# EAGLE board Sensor Board@49fd1e21e8034814a26c2d07324bd6b1 (EAGLE 6.4)
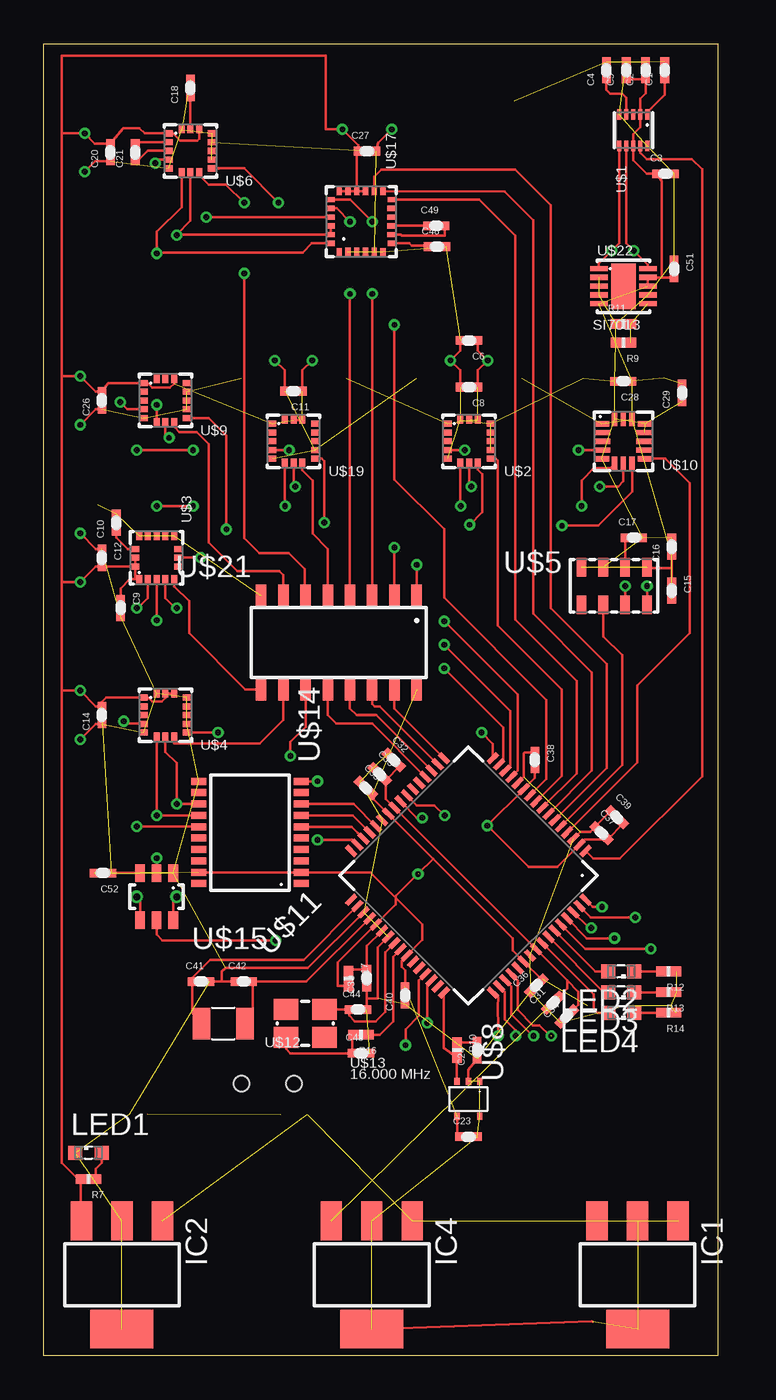
[diagram p0: board, top side]
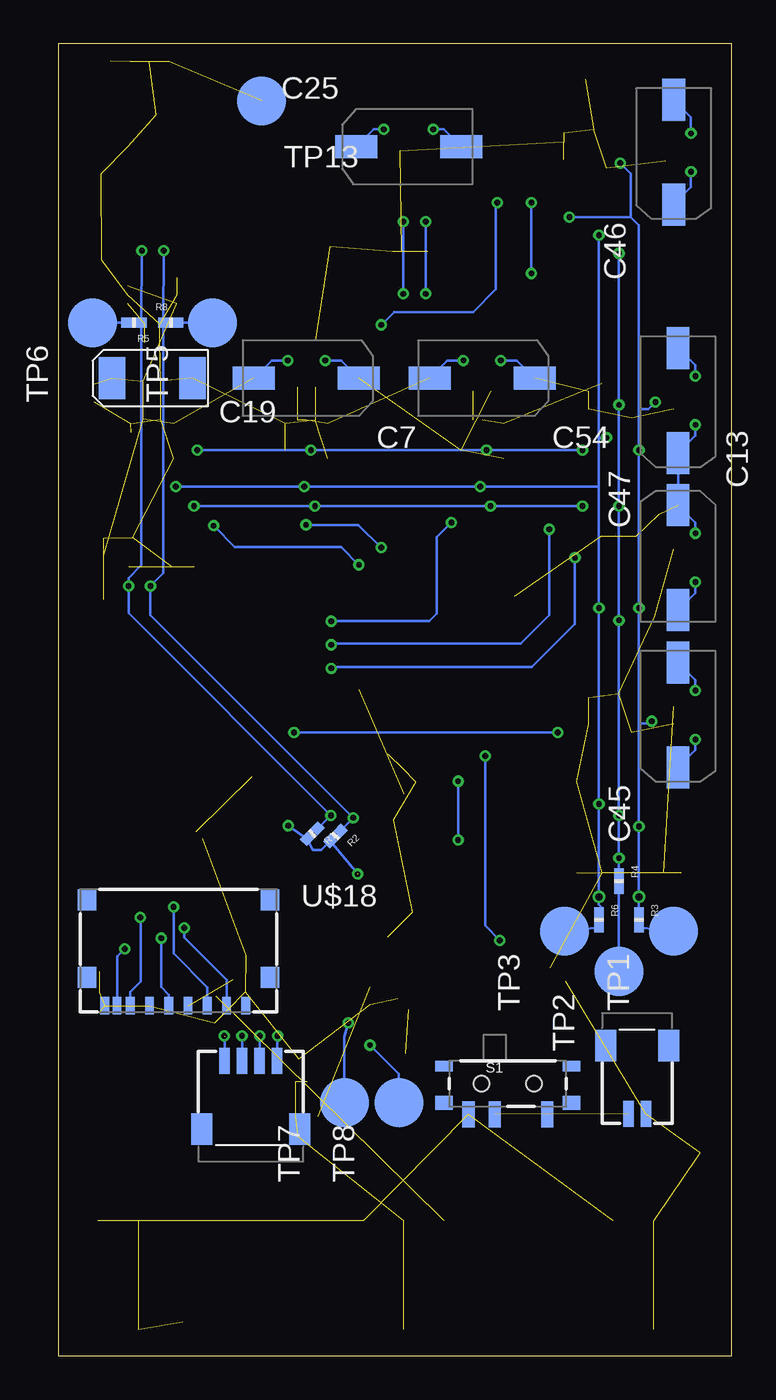
[diagram p1: board, bottom side, seen from below]

Size 38.5 x 75 mm. Coordinates in mm from the lower left corner, seen from the top.
Outline: 38.5,0 0,0 0,75 38.5,75 38.5,0
Copper layers (1*2*15*16): Top 0.035mm / dielectric 0.2mm / Route2 0.0175mm / dielectric 1.1mm / Route15 0.0175mm / dielectric 0.2mm / Bottom 0.035mm
Design rules "SeeedStudio_DRU_no_angle_20130527": minimum track width 6mil, minimum drill 12mil, track to track 6mil, track to pad 6mil, pad to pad 6mil, via to via 6mil, smd to smd 0mil, copper to edge 10mil, drill to drill 10mil, minimum pad ring 6mil, minimum via ring 6mil, stop-mask expansion 2mil, vias tented up to drill 25mil, thermal gap 10mil

## Footprints (pad centres in the part's own frame; a part is rotated, then mirrored left to right if it is on the bottom)
C0402 = smd 0.5 x 0.5: 1 -0.5,0; 2 0.5,0
4.3X7.3SMD = smd 2.4 x 1.3: P$1 -3,0; P$2 3,0
EIA6032 = smd 1.5 x 2.4: P$1 -2.3,0; P$2 2.3,0
SOT223 = smd 1.219 x 2.235: 1 -2.311,-3.099; 2 0,-3.099; 3 2.311,-3.099 | smd 3.6 x 2.2: 4 0,3.099
501568-0207 = smd 0.6 x 1.5: P$1 -0.5,3.9; P$2 0.5,3.9 | smd 1.2 x 1.8: P$5 -1.8,0; P$6 1.8,0
LED_SML0603 = smd 0.8 x 0.8: A 0.75,0; C -0.75,0
R0402 = smd 0.6 x 0.55: 1 -0.425,0; 2 0.425,0
SWITCH-SPST-SMD-A = smd 0.7 x 1.5: 1 -2.25,-1.75; 2 -0.75,-1.75; 3 2.25,-1.75 | smd 1 x 0.6: GND1 -3.65,1; GND3 3.65,1 | smd 1 x 0.8: GND2 -3.65,-1.1; GND4 3.65,-1.1 | hole 0.9: -1.5,0; 1.5,0
TESTPAD(ROUND) = smd 2.794 x 2.794: P$1 0,0
DFN-10(2X2) = smd 0.6 x 0.225: P$1 -0.9,0.8; P$2 -0.9,0.4; P$3 -0.9,0; P$4 -0.9,-0.4; P$5 -0.9,-0.8; P$6 0.9,-0.8; P$7 0.9,-0.4; P$8 0.9,0; P$9 0.9,0.4; P$10 0.9,0.8
LGA-16(3X3) = smd 0.45 x 0.345: P$1 -1.225,1; P$2 -1.225,0.5; P$3 -1.225,0; P$4 -1.225,-0.5; P$5 -1.225,-1; P$9 1.225,-1; P$10 1.225,-0.5; P$11 1.225,0; P$12 1.225,0.5; P$13 1.225,1 | smd 0.345 x 0.45: P$6 -0.5,-1.225; P$7 0,-1.225; P$8 0.5,-1.225; P$14 0.5,1.225; P$15 0,1.225; P$16 -0.5,1.225
LGA-8(5X3) = smd 0.55 x 1.05: P$1 -1.875,-1.075; P$2 -0.625,-1.075; P$3 0.625,-1.075; P$4 1.875,-1.075; P$5 1.875,1.075; P$6 0.625,1.075; P$7 -0.625,1.075; P$8 -1.875,1.075
501568-0407 = smd 0.6 x 1.5: P$1 -1.5,3.9; P$2 -0.5,3.9; P$3 0.5,3.9; P$4 1.5,3.9 | smd 1.2 x 1.8: P$5 -2.8,0; P$6 2.8,0
SOT323-5L = smd 0.4 x 0.3: P$1 1,-0.65; P$2 1,0; P$3 1,0.65; P$4 -1,0.65; P$5 -1,-0.65
LGA-16(3X3.25) = smd 0.865 x 0.3: P$1 -1.242,1; P$5 -1.242,-1; P$9 1.242,-1; P$13 1.242,1 | smd 0.925 x 0.3: P$2 -1.212,0.5; P$3 -1.212,0; P$4 -1.212,-0.5; P$10 1.212,-0.5; P$11 1.212,0; P$12 1.212,0.5 | smd 0.3 x 0.8: P$6 -0.5,-1.275; P$7 0,-1.275; P$8 0.5,-1.275; P$14 0.5,1.275; P$15 0,1.275; P$16 -0.5,1.275
S-PQFP-G64 = smd 0.75 x 0.27: P$1 -5.725,3.75; P$2 -5.725,3.25; P$3 -5.725,2.75; P$4 -5.725,2.25; P$5 -5.725,1.75; P$6 -5.725,1.25; P$7 -5.725,0.75; P$8 -5.725,0.25; P$9 -5.725,-0.25; P$10 -5.725,-0.75; P$11 -5.725,-1.25; P$12 -5.725,-1.75; P$13 -5.725,-2.25; P$14 -5.725,-2.75; P$15 -5.725,-3.25; P$16 -5.725,-3.75; P$33 5.725,-3.75; P$34 5.725,-3.25; P$35 5.725,-2.75; P$36 5.725,-2.25; P$37 5.725,-1.75; P$38 5.725,-1.25; P$39 5.725,-0.75; P$40 5.725,-0.25; P$41 5.725,0.25; P$42 5.725,0.75; P$43 5.725,1.25; P$44 5.725,1.75; P$45 5.725,2.25; P$46 5.725,2.75; P$47 5.725,3.25; P$48 5.725,3.75 | smd 0.27 x 0.75: P$17 -3.75,-5.725; P$18 -3.25,-5.725; P$19 -2.75,-5.725; P$20 -2.25,-5.725; P$21 -1.75,-5.725; P$22 -1.25,-5.725; P$23 -0.75,-5.725; P$24 -0.25,-5.725; P$25 0.25,-5.725; P$26 0.75,-5.725; P$27 1.25,-5.725; P$28 1.75,-5.725; P$29 2.25,-5.725; P$30 2.75,-5.725; P$31 3.25,-5.725; P$32 3.75,-5.725; P$49 3.75,5.725; P$50 3.25,5.725; P$51 2.75,5.725; P$52 2.25,5.725; P$53 1.75,5.725; P$54 1.25,5.725; P$55 0.75,5.725; P$56 0.25,5.725; P$57 -0.25,5.725; P$58 -0.75,5.725; P$59 -1.25,5.725; P$60 -1.75,5.725; P$61 -2.25,5.725; P$62 -2.75,5.725; P$63 -3.25,5.725; P$64 -3.75,5.725
2-SMD(3.2X1.5) = smd 1 x 1.8: P$1 -1.25,0; P$2 1.25,0
4-SMD(3.2X2.5) = smd 1.4 x 1.2: P$1 -1.1,-0.8; P$2 1.1,-0.8; P$3 1.1,0.8; P$4 -1.1,0.8
TSSOP-(PW)-20 = smd 0.4 x 0.85: P$1 -2.925,-2.925; P$2 -2.275,-2.925; P$3 -1.625,-2.925; P$4 -0.975,-2.925; P$5 -0.325,-2.925; P$6 0.325,-2.925; P$7 0.975,-2.925; P$8 1.625,-2.925; P$9 2.275,-2.925; P$10 2.925,-2.925; P$11 2.925,2.925; P$12 2.275,2.925; P$13 1.625,2.925; P$14 0.975,2.925; P$15 0.325,2.925; P$16 -0.325,2.925; P$17 -0.975,2.925; P$18 -1.625,2.925; P$19 -2.275,2.925; P$20 -2.925,2.925
SOT23-6 = smd 0.55 x 1: P$1 0.95,1.35; P$2 0,1.35; P$3 -0.95,1.35; P$4 -0.95,-1.35; P$5 0,-1.35; P$6 0.95,-1.35
LGA-24(4X4) = smd 0.432 x 0.3: P$1 -1.725,1.25; P$6 -1.725,-1.25; P$13 1.725,-1.25; P$18 1.725,1.25 | smd 0.45 x 0.3: P$2 -1.725,0.75; P$3 -1.725,0.25; P$4 -1.725,-0.25; P$5 -1.725,-0.75; P$14 1.725,-0.75; P$15 1.725,-0.25; P$16 1.725,0.25; P$17 1.725,0.75 | smd 0.3 x 0.432: P$7 -1.25,-1.725; P$12 1.25,-1.725; P$19 1.25,1.725; P$24 -1.25,1.725 | smd 0.3 x 0.45: P$8 -0.75,-1.725; P$9 -0.25,-1.725; P$10 0.25,-1.725; P$11 0.75,-1.725; P$20 0.75,1.725; P$21 0.25,1.725; P$22 -0.25,1.725; P$23 -0.75,1.725
SD-105027-1001 = smd 0.5 x 1: P$1 3.85,-6.66; P$2 2.75,-6.66; P$3 1.65,-6.66; P$4 0.55,-6.66; P$5 -0.55,-6.66; P$6 -1.65,-6.66; P$7 -2.75,-6.66; P$8 -3.51,-6.66; P$9 -4.21,-6.66 | smd 1.05 x 1.2: P$10 -5.225,-0.6; P$11 -5.225,-5.05; P$12 5.225,-5.05; P$13 5.225,-0.6
SOIC-16 = smd 0.6 x 1.27: P$1 -4.445,-2.675; P$2 -3.175,-2.675; P$3 -1.905,-2.675; P$4 -0.635,-2.675; P$5 0.635,-2.675; P$6 1.905,-2.675; P$7 3.175,-2.675; P$8 4.445,-2.675; P$9 4.445,2.675; P$10 3.175,2.675; P$11 1.905,2.675; P$12 0.635,2.675; P$13 -0.635,2.675; P$14 -1.905,2.675; P$15 -3.175,2.675; P$16 -4.445,2.675
DFN-10(3X3) = smd 1 x 0.3: P$1 -1.4,1; P$2 -1.4,0.5; P$3 -1.4,0; P$4 -1.4,-0.5; P$5 -1.4,-1; P$6 1.4,-1; P$7 1.4,-0.5; P$8 1.4,0; P$9 1.4,0.5; P$10 1.4,1 | smd 1.4 x 2.6: P$11 0,0

## Placement (x,y rotation side)
C1  100nF  [C0402]  35.48,73.49 90 top
C2  1uF  [C0402]  34.39,73.48 90 top
C3  100nF  [C0402]  35.53,67.56 0 top
C4  100nF  [C0402]  32.16,73.48 90 top
C5  100nF  [C0402]  33.28,73.48 90 top
C6  0.1uF  [C0402]  24.31,58.04 180 top
C7  10uF  [4.3X7.3SMD]  24.31,55.88 0 bottom
C8  100nF  [C0402]  24.31,55.37 180 top
C9  100nF  [C0402]  4.39,42.75 270 top
C10  10nF  [C0402]  4.14,47.62 90 top
C11  1uF  [C0402]  14.27,55.14 180 top
C12  10uF  [C0402]  3.33,45.62 270 top
C13  100nF  [4.3X7.3SMD]  3.07,45.62 90 bottom
C14  100nF  [C0402]  3.33,36.63 90 top
C15  100nF  [C0402]  35.89,43.74 270 top
C16  10uF  [C0402]  35.89,46.25 90 top
C17  100nF  [C0402]  33.72,46.76 0 top
C18  4.7uF  [C0402]  8.38,72.47 90 top
C19  1uF  [EIA6032]  33.12,55.88 0 bottom
C20  100nF  [C0402]  3.81,68.8 90 top
C21  0.22uF  [C0402]  5.23,68.8 90 top
C23  0.1uF  [C0402]  24.27,12.52 0 top
C24  1uF  [C0402]  24.76,17.48 90 top
C25  10uF  [4.3X7.3SMD]  18.46,69.11 180 bottom
C26  100nF  [C0402]  3.33,54.61 90 top
C27  100nF  [C0402]  18.46,68.86 0 top
C28  0.1uF  [C0402]  33.12,55.7 180 top
C29  0.1uF  [C0402]  36.47,55.04 90 top
C30  0.1uF  [C0402]  18.46,21.59 90 top
C31  0.1uF  [C0402]  29.1,20.18 45 top
C32  0.1uF  [C0402]  20,34.05 315 top
C33  2.2uF  [C0402]  19.2,33.25 315 top
C34  1.0uF  [C0402]  29.89,19.39 45 top
C35  0.01uF  [C0402]  18.41,32.46 315 top
C36  0.1uF  [C0402]  28.15,21.16 45 top
C37  0.01uF  [C0402]  31.87,29.87 315 top
C38  0.1uF  [C0402]  28.07,34.06 270 top
C39  0.01uF  [C0402]  32.75,30.78 315 top
C40  1.0uF  [C0402]  20.65,20.6 90 top
C41  24pF  [C0402]  8.99,21.39 0 top
C42  24pF  [C0402]  11.43,21.39 0 top
C43  10pF  [C0402]  18.13,17.3 0 top
C44  10pF  [C0402]  17.96,19.79 0 top
C45  10uF  [4.3X7.3SMD]  3.07,36.63 270 bottom
C46  10uF  [4.3X7.3SMD]  3.33,68.8 270 bottom
C47  10uF  [4.3X7.3SMD]  3.07,54.61 270 bottom
C48  4.7uF  [C0402]  22.48,63.4 0 top
C49  0.22uF  [C0402]  22.43,64.59 0 top
C51  [C0402]  36.02,62.13 270 top
C52  0.1uF  [C0402]  3.38,27.59 180 top
C54  10uF  [4.3X7.3SMD]  14.27,55.88 0 bottom
IC1  LT1963EST-1.5  [SOT223]  33.93,4.62 180 top
IC2  LT1963EST-1.5  [SOT223]  4.47,4.62 180 top
IC4  LT1963EST-1.5  [SOT223]  18.74,4.62 180 top
J1  501568-0207  [501568-0207]  5.41,17.73 180 bottom
LED1  Green  [LED_SML0603]  2.55,11.61 0 top
LED2  Green  [LED_SML0603]  32.99,21.97 180 top
LED3  Green  [LED_SML0603]  32.99,20.78 180 top
LED4  Green  [LED_SML0603]  32.99,19.61 180 top
R1  10k  [R0402]  23.98,29.84 225 bottom
R2  10k  [R0402]  22.66,29.72 225 bottom
R3  0  [R0402]  5.31,24.92 270 bottom
R4  0  [R0402]  6.45,27.13 270 bottom
R5  0  [R0402]  34.16,59.05 180 bottom
R6  0  [R0402]  7.59,24.92 270 bottom
R7  10k  [R0402]  2.55,10.11 180 top
R8  0  [R0402]  32.06,59.05 0 bottom
R9  2.0k  [R0402]  33.12,57.91 180 top
R10  200  [R0402]  23.61,17.48 270 top
R11  1.0k  [R0402]  33.12,58.98 0 top
R12  10k  [R0402]  35.71,21.97 180 top
R13  10k  [R0402]  35.71,20.78 180 top
R14  10k  [R0402]  35.71,19.61 180 top
R16  0  [R0402]  18.13,18.35 180 top
R17  10k  [R0402]  17.42,21.56 270 top
S1  Power  [SWITCH-SPST-SMD-A]  12.8,15.54 0 bottom
TP1  TESTPAD(ROUND)  [TESTPAD(ROUND)]  3.33,24.27 270 bottom
TP2  TESTPAD(ROUND)  [TESTPAD(ROUND)]  6.45,21.97 270 bottom
TP3  TESTPAD(ROUND)  [TESTPAD(ROUND)]  9.57,24.27 270 bottom
TP5  TESTPAD(ROUND)  [TESTPAD(ROUND)]  29.67,59.05 270 bottom
TP6  TESTPAD(ROUND)  [TESTPAD(ROUND)]  36.53,59.05 270 bottom
TP7  TESTPAD(ROUND)  [TESTPAD(ROUND)]  22.15,14.48 270 bottom
TP8  TESTPAD(ROUND)  [TESTPAD(ROUND)]  19.02,14.48 270 bottom
TP13  TESTPAD(ROUND)  [TESTPAD(ROUND)]  26.87,71.73 0 bottom
U$1  MAG3110  [DFN-10(2X2)]  33.69,70.05 270 top
U$2  H3LIS331DLTR  [LGA-16(3X3)]  24.31,52.27 0 top
U$3  L3GD20H  [LGA-16(3X3)]  6.45,45.62 90 top
U$4  LPS331AP  [LGA-16(3X3)]  6.95,36.63 0 top
U$5  MPL3115A2  [LGA-8(5X3)]  32.6,44 180 top
U$6  LSM303D  [LGA-16(3X3)]  8.38,68.87 0 top
U$7  501568-0407  [501568-0407]  27.48,12.95 0 bottom
U$8  STLM20  [SOT323-5L]  24.27,14.68 90 top
U$9  LIS3DH  [LGA-16(3X3)]  6.95,54.61 0 top
U$10  ADXL362  [LGA-16(3X3.25)]  33.12,52.27 0 top
U$11  TM4C1233H6PM  [S-PQFP-G64]  24.27,27.46 225 top
U$12  32.768 kHz  [2-SMD(3.2X1.5)]  10.26,18.99 0 top
U$13  16.000 MHz  [4-SMD(3.2X2.5)]  14.95,18.99 0 top
U$14  TXB0108  [TSSOP-(PW)-20]  11.78,29.91 90 top
U$15  ADT7301  [SOT23-6]  6.45,26.24 0 top
U$17  LSM9DS0  [LGA-24(4X4)]  18.13,64.84 90 top
U$18  SD-105027-101  [SD-105027-1001]  31.62,26.67 0 bottom
U$19  MAX21000  [LGA-16(3X3)]  14.27,52.27 0 top
U$21  SN74HC42  [SOIC-16]  16.86,40.77 180 top
U$22  SI7013  [DFN-10(3X3)]  33.12,61.14 0 top

## Library data of the parts
C1-C18 C20 C21 C23-C49 C51 C52 C54 R1-R14 R16 R17 TP1-TP3 TP7 TP8 TP13 = Kas-Passives
C19 = SparkFun-Passives
IC1 IC2 IC4 = linear-technology; MPN: LT1963EST-1.5; OC_FARNELL: 1663528; OC_NEWARK: 57M7534
J1 TP5 TP6 U$7 U$18 = Kas-Connectors
LED1-LED4 = eagle-ltspice; SPICEMODEL: NONE; SPICEPREFIX: D; SPICETYPE: diode
S1 = SparkFun-Electromechanical
U$1-U$6 U$8-U$10 U$15 U$17 U$19 U$22 = Kas-Sensors
U$11 = Kas-Microcontroller
U$12 U$13 = Kas-Crystal
U$14 U$21 = Kas-Buffers & Level Shifters

## Nets
1.2V: C31.2 C32.2 C33.2 C34.2 IC4.3 U$11.P$25 U$11.P$56
3.3V: C2.1 C3.1 C5.1 C6.1 C7.P$1 C8.1 C9.1 C11.1 C12.2 C13.P$1 C14.2 C15.1 C16.1 C19.P$1 C20.2 C23.1 C25.P$1 C26.2 C27.1 C28.1 C29.2 C35.2 C36.2 C37.2 C38.2 C39.2 C40.2 C45.P$1 C46.P$1 C47.P$1 C51.2 C52.1 C54.P$1 IC2.3 R1.2 R2.2 R7.2 R17.2 U$1.P$2 U$1.P$8 U$2.P$1 U$2.P$14 U$2.P$15 U$3.P$1 U$3.P$15 U$3.P$16 U$4.P$1 U$4.P$14 U$4.P$15 U$5.P$1 U$5.P$4 U$6.P$1 U$6.P$14 U$8.P$4 U$9.P$1 U$9.P$14 U$10.P$1 U$10.P$14 U$11.P$2 U$11.P$11 U$11.P$26 U$11.P$37 U$11.P$42 U$11.P$54 U$14.P$2 U$14.P$19 U$15.P$3 U$17.P$15 U$17.P$16 U$17.P$17 U$17.P$18 U$18.P$4 U$19.P$1 U$19.P$14 U$19.P$15 U$21.P$16 U$22.P$5 U$22.P$8 U$22.P$9
!CS-ADT7301: U$15.P$5 U$21.P$11
!CS-ADXL362: U$10.P$8 U$21.P$1
!CS-H3LIS331DLTR: U$2.P$8 U$21.P$2
!CS-LIS3DH: U$9.P$8 U$21.P$7
!CS-LPS331: U$4.P$8 U$21.P$10
!CS-LS3GD20: U$3.P$5 U$21.P$9
!CS-LSM9D30-G: U$17.P$19 U$21.P$3
!CS-LSM9DS0-XM: U$17.P$20 U$21.P$4
!CS-LSM303: U$6.P$8 U$21.P$6
!CS-MAX21000: U$19.P$8 U$21.P$5
ANALOG-OUT-STLM20: R10.2 U$8.P$3 U$11.P$48
DEN-L3GD: U$3.P$8
GND: C1.2 C2.2 C3.2 C4.2 C5.2 C6.2 C7.P$2 C8.2 C9.2 C10.2 C11.2 C12.1 C13.P$2 C14.1 C15.2 C16.2 C17.2 C18.2 C19.P$2 C20.1 C23.2 C24.1 C25.P$2 C26.1 C27.2 C28.2 C29.1 C30.1 C31.1 C32.1 C33.1 C34.1 C35.1 C36.1 C37.1 C38.1 C39.1 C40.1 C41.2 C42.1 C43.2 C44.2 C45.P$2 C46.P$2 C47.P$2 C48.2 C51.1 C52.2 C54.P$2 IC1.2 IC1.4 IC2.2 IC2.4 IC4.2 IC4.4 J1.P$1 LED1.C R9.2 R11.1 R12.1 R13.1 R14.1 TP13.P$1 U$1.P$5 U$1.P$10 U$2.P$5 U$2.P$10 U$2.P$12 U$2.P$13 U$2.P$16 U$3.P$9 U$3.P$10 U$3.P$11 U$3.P$12 U$3.P$13 U$4.P$5 U$4.P$10 U$4.P$11 U$4.P$12 U$4.P$13 U$4.P$16 U$5.P$3 U$6.P$5 U$6.P$10 U$6.P$12 U$6.P$13 U$6.P$16 U$8.P$1 U$8.P$2 U$8.P$5 U$9.P$5 U$9.P$10 U$9.P$12 U$10.P$5 U$10.P$12 U$10.P$13 U$10.P$16 U$11.P$3 U$11.P$12 U$11.P$27 U$11.P$35 U$11.P$39 U$11.P$55 U$14.P$11 U$15.P$1 U$17.P$2 U$17.P$3 U$17.P$4 U$17.P$5 U$17.P$6 U$18.P$6 U$18.P$9 U$19.P$5 U$19.P$10 U$21.P$8 U$22.P$2 U$22.P$3 U$22.P$4 U$22.P$7
IND-LED-1: LED2.A U$11.P$59
IND-LED-2: LED3.A U$11.P$58
IND-LED-3: LED4.A U$11.P$57
INT1-L3GD: U$3.P$7 U$11.P$15
INT1-MAG3110: U$1.P$9 U$11.P$1
INT1-MPL311: U$5.P$6 U$11.P$5
INT2-ADXL362: U$10.P$9 U$11.P$4
INT2-H3LIS331: U$2.P$9 U$11.P$9
INT2-LIS3DH: U$9.P$9 U$11.P$14
INT2-LPS331: U$4.P$9 U$11.P$16
INT2-LSM303: U$6.P$9 U$11.P$10
INT2-MAX21000: U$11.P$13 U$19.P$9
LSM9D-DEN-G: U$17.P$10
LSM9D-DRGY-G: U$11.P$8 U$17.P$12
LSM9D-INT1-XM: U$11.P$7 U$17.P$13
LSM9D-INT2-XM: U$11.P$6 U$17.P$14
MISO-A: U$11.P$28 U$14.P$8
MISO-B: R6.1 U$2.P$7 U$3.P$4 U$4.P$7 U$6.P$7 U$9.P$7 U$10.P$7 U$14.P$13 U$15.P$6 U$17.P$22 U$17.P$23 U$19.P$7
MOSI-A: U$11.P$29 U$14.P$7
MOSI-B: R4.1 U$2.P$6 U$3.P$3 U$4.P$6 U$6.P$6 U$9.P$6 U$10.P$6 U$14.P$14 U$15.P$2 U$17.P$24 U$19.P$6
N$1: C1.1 U$1.P$1
N$3: C4.1 U$1.P$4
N$4: C10.1 U$3.P$14
N$5: C17.1 U$5.P$2
N$6: C18.1 U$6.P$15
N$7: C21.2 U$6.P$2
N$8: C48.1 U$17.P$7
N$9: C24.2 R10.1
N$10: C30.2 R17.1 U$11.P$38
N$11: C42.2 U$11.P$36 U$12.P$2
N$12: C41.1 U$11.P$34 U$12.P$1
N$14: C43.1 R16.2 U$13.P$1
N$15: C21.1 U$6.P$3
N$16: C44.1 U$11.P$40 U$13.P$3
N$17: R16.1 U$11.P$41
N$18: R9.1 R11.2 U$22.P$6
N$19: J1.P$2 S1.2
N$21: C49.2 U$17.P$8
N$22: C49.1 U$17.P$9
N$23: IC1.1 IC2.1 IC4.1 S1.1
N$24: R5.2 TP6.P$1
N$26: R8.2 TP5.P$1
N$27: LED1.A R7.1
N$29: LED4.C R14.2
N$31: LED3.C R13.2
N$32: R3.2 TP1.P$1
N$33: R4.2 TP2.P$1
N$34: R6.2 TP3.P$1
N$35: LED2.C R12.2
SCL-0: R1.1 R5.1 U$1.P$7 U$5.P$8 U$11.P$23 U$22.P$10
SCLK-A: U$11.P$30 U$14.P$6
SCLK-B: R3.1 U$2.P$4 U$3.P$2 U$4.P$4 U$6.P$4 U$9.P$4 U$10.P$4 U$14.P$15 U$15.P$4 U$17.P$21 U$19.P$4
SD-CARD-INSERT: U$11.P$60 U$18.P$8
SD-CS: U$11.P$62 U$18.P$2
SD-MISO: U$11.P$63 U$18.P$7
SD-MOSI: U$11.P$64 U$18.P$3
SD-SCLK: U$11.P$61 U$18.P$5
SDA-0: R2.1 R8.1 U$1.P$6 U$5.P$7 U$11.P$24 U$22.P$1
SPI-ADDR0: U$11.P$17 U$21.P$15
SPI-ADDR1: U$11.P$18 U$21.P$14
SPI-ADDR2: U$11.P$19 U$21.P$13
SPI-ADDR3: U$11.P$20 U$21.P$12
SPI-ENABLE: U$11.P$31 U$14.P$10
SWCLK: U$7.P$1 U$11.P$52
SWDIO: U$7.P$2 U$11.P$51
SWO: U$7.P$4 U$11.P$49
TDI: U$7.P$3 U$11.P$50
U1RX: TP8.P$1 U$11.P$45
U1TX: TP7.P$1 U$11.P$46

## Tracks (layer width: path | path; a pad name or v marks a point on that pad's centre or on a via)
1.2V  (1 unrouted)
  Top 0.152: C32.2 C33.2 19.55,31.82 U$11.P$25 U$11.P$56 28.14,23.19 28.16,23.19 29.91,21.45 | 30.24,19.88 C34.2 30.55,20.06 30.55,20.8 29.91,21.45 | C31.2 29.91,20.99 29.91,21.45
3.3V  (via drill 0.33)  (22 unrouted)
  Top 0.152: C39.2 C37.2 32.23,29.52 30.92,29.52 U$11.P$2 29.34,27.94 27.71,27.94 v25.35,30.3 U$11.P$11 28.07,33.02 C38.2 | U$4.P$1 3.57,37.63 3.33,37.38 C14.2 2.98,37.13 v2.08,38.02 1.04,38.02 | U$3.P$15 U$3.P$16 | U$3.P$16 C12.2 2.98,45.12 v2.08,44.22 1.04,44.22 | U$4.P$1 5.48,37.63 | U$4.P$15 U$4.P$14 | C5.1 C2.1 34.39,72.16 34.09,71.86 U$1.P$2 34.09,70.23 33.68,69.83 33.68,69.16 U$1.P$8 33.69,68.33 34.46,67.56 C3.1 35.3,67.14 35.3,61.63 | C35.2 18.86,31.8 U$11.P$26 22.26,28.41 | U$17.P$16 U$17.P$17 U$17.P$18 | U$17.P$15 U$17.P$16 | U$14.P$19 U$14.P$2 18.66,27.64 20.13,26.18 | 20.13,26.18 21.64,24.66 21.64,23.77 U$11.P$42 20.45,22.58 20.45,22.23 20.65,22.02 C40.2 | 20.13,26.18 20.13,25.79 U$11.P$37 16.81,22.48 16.81,21.13 16.82,21.14 R17.2 | 22.26,28.41 26.8,23.87 26.8,23.16 U$11.P$54 28.44,21.51 C36.2 | v21.39,27.53 20.13,26.28 20.13,26.18 | U$19.P$15 U$19.P$14 | 22.26,28.41 21.41,27.56 | 1.04,38.02 1.04,11.02 1.95,10.11 R7.2 2.13,7.75 IC2.3 | 1.04,38.02 1.04,44.22 | 1.04,44.22 1.04,56.01 | 1.04,56.01 1.04,69.88 | 1.04,69.88 1.04,74.32 16.1,74.32 16.1,70.1 v17.07,70.1 17.96,69.21 C27.1 17.88,68.78 U$17.P$16 | 1.04,69.88 v2.33,69.88 2.92,69.3 C20.2 4.55,70.18 5.46,70.18 5.77,69.87 U$6.P$1 7.38,69.87 7.8,69.44 8.76,69.44 8.88,69.56 U$6.P$14 | 1.04,56.01 v2.08,56.01 2.98,55.11 C26.2 3.68,55.61 U$9.P$1 5.94,55.61 6.2,55.35 7.21,55.35 7.45,55.58 U$9.P$14 | U$3.P$16 5.22,44.39 U$3.P$1 4.92,44.39 4.39,43.87 C9.1 | U$4.P$15 | C16.1 35.89,45.03 | 35.89,45.03 C15.1 | U$5.P$1 34.52,45.03 35.89,45.03 | 35.3,61.63 U$22.P$9 U$22.P$8 | 35.3,61.63 C51.2 | U$8.P$4 23.62,12.67 C23.1 | U$4.P$1 5.93,37.63 6.2,37.39 6.73,37.39 6.95,37.61 U$4.P$15
  Top 0.152: C11.1 14.77,56.33 v15.34,56.9 | C8.1 24.81,56.33 v25.37,56.9 24.81,57.46 C6.1 | C52.1 U$15.P$3
  Bottom 0.152: C47.P$1 2.08,56.62 v2.08,56.01 | C45.P$1 2.08,38.64 v2.08,38.02 | C13.P$1 2.08,43.61 v2.08,44.22 | C46.P$1 2.33,70.81 v2.33,69.88 | C25.P$1 16.45,70.1 v17.07,70.1 | v25.35,30.3 R1.2 23.96,28.91 23.47,28.91 R2.2 v21.39,27.53 | C54.P$1 16.26,56.9 v15.34,56.9 | C7.P$1 26.29,56.9 v25.37,56.9
!CS-ADT7301  (via drill 0.33)
  Top 0.152: U$21.P$11 14.96,35.94 14.1,35.08 v14.1,34.29 | U$15.P$5 6.45,24.08 6.78,23.75 v13.26,23.75
  Bottom 0.152: v14.1,34.29 14.1,24.59 v13.26,23.75
!CS-ADXL362  (via drill 0.33)
  Top 0.152: U$21.P$1 v21.31,45.21 | v29.61,47.45 31.67,47.45 33.62,49.4 U$10.P$8
  Bottom 0.152: v21.31,45.21 22.32,46.23 28.4,46.23 v29.61,47.45
!CS-H3LIS331DLTR  (via drill 0.33)
  Top 0.152: U$21.P$2 v20.04,46.2 | v24.33,47.5 25.07,48.23 25.07,50.39 24.81,50.65 U$2.P$8
  Bottom 0.152: v24.33,47.5 21.34,47.5 v20.04,46.2
!CS-LIS3DH
  Top 0.152: U$21.P$7 13.69,44.63 13.46,44.86 11.05,44.86 9.42,46.48 9.42,52.12 8.74,52.81 7.75,52.81 7.48,53.08 U$9.P$8
!CS-LPS331
  Top 0.152: U$21.P$10 13.69,36.35 12.34,35 7.45,35 U$4.P$8
!CS-LS3GD20
  Top 0.152: U$21.P$9 11.51,38.09 8.3,41.3 8.3,43.13 7.45,43.98 U$3.P$5
!CS-LSM9D30-G  (via drill 0.33)
  Top 0.152: U$21.P$3 v18.77,60.71 | U$17.P$19 17.52,66.09 v18.77,64.84
  Bottom 0.152: v18.77,60.71 v18.77,64.84
!CS-LSM9DS0-XM  (via drill 0.33)
  Top 0.152: U$21.P$4 v17.5,60.71 | 16.16,65.58 U$17.P$20 16.75,65.59 v17.5,64.84
  Bottom 0.152: v17.5,60.71 v17.5,64.84
!CS-LSM303  (via drill 0.33)
  Top 0.152: v11.45,61.87 11.45,46.74 12.32,45.87 13.99,45.87 14.91,44.96 14.91,43.49 U$21.P$6 | v11.45,65.91 10.41,66.95 9.42,66.95 8.88,67.5 U$6.P$8
  Bottom 0.152: v11.45,61.87 v11.45,65.91
!CS-MAX21000
  Top 0.152: U$21.P$5 16.23,46.13 15.37,46.99 15.37,50.04 14.77,50.63 U$19.P$8
ANALOG-OUT-STLM20
  Top 0.152: U$11.P$48 22.87,17.59 R10.2 23.59,16.81 23.59,15.72 23.62,15.7 U$8.P$3
GND  (via drill 0.33)  (101 unrouted)
  Top 0.152: U$11.P$55 27.79,22.86 | 19.67,23.94 U$11.P$39 19.09,23.34 19.09,20.42 18.46,20.42 | v2.08,53.21 2.98,54.11 C26.1 | v2.08,35.23 2.98,36.13 C14.1 | v2.08,47.02 2.98,46.12 C12.1 | v2.33,67.69 2.94,68.3 C20.1 | U$11.P$12 27.43,33.1 27.43,34.44 27.48,34.49 28,34.49 C38.1 | U$8.P$2 24.27,16.34 C24.1 | v19.89,70.1 19.11,69.33 C27.2 | IC4.4 31.32,1.98 31.37,1.93 | C44.2 18.46,19.93 18.46,20.42 | 18.46,20.42 C30.1 | 32.3,31.22 C39.1 31.52,30.25 C37.1 | U$11.P$3 30.64,29.95 31.24,29.95 C37.1 | 31.41,30.32 C37.1 | C2.2 | C41.2 10.18,21.39 | 10.18,21.39 C42.1 | U$11.P$35 15.09,22.17 10.39,22.17 10.18,21.97 10.18,21.39 | C11.2 13.77,56.33 v13.21,56.9 | C8.2 23.81,56.33 v23.24,56.9 23.81,57.46 C6.2
  Bottom 0.152: v2.08,53.21 2.08,52.6 C47.P$2 C13.P$2 2.08,47.63 v2.08,47.02 | C45.P$2 2.08,34.62 v2.08,35.23 | C46.P$2 2.33,66.79 v2.33,67.69 | C25.P$2 20.47,70.1 v19.89,70.1 | C54.P$2 12.29,56.9 v13.21,56.9 | C7.P$2 22.32,56.9 v23.24,56.9
IND-LED-1
  Top 0.152: U$11.P$59 31.52,21.97 LED2.A
IND-LED-2
  Top 0.152: U$11.P$58 32.01,20.78 LED3.A
IND-LED-3
  Top 0.152: U$11.P$57 31.42,20.66 31.42,19.81 31.62,19.61 LED4.A
INT1-L3GD  (via drill 0.33, 0.33 pad 0.25)
  Top 0.152: v8.96,45.62 U$3.P$7 | U$11.P$15 26.26,34.05 26.26,35.92 v22.88,39.29
  Bottom 0.152: v22.88,39.29 22.83,39.37 11.43,39.37 8.96,41.83 v8.96,45.62
INT1-MAG3110
  Top 0.152: U$11.P$1 31.4,28.42 32.92,28.42 37.62,33.12 37.62,67.82 37.03,68.4 34.47,68.4 34.09,68.78 U$1.P$9
INT1-MPL311
  Top 0.152: U$11.P$5 33.04,33.76 33.04,40.04 31.97,41.11 U$5.P$6
INT2-ADXL362
  Top 0.152: U$10.P$9 35.52,51.27 36.91,49.89 36.91,41.3 33.91,38.3 33.91,33.92 U$11.P$4
INT2-H3LIS331
  Top 0.152: U$11.P$9 29.59,33.13 29.59,38.09 25.93,41.74 25.93,51.18 25.84,51.27 U$2.P$9
INT2-LIS3DH  (via drill 0.33)
  Top 0.152: 8.39,53.61 U$9.P$9 9.42,53.61 10.44,52.59 v10.44,47.24 | U$11.P$14 26.67,33.75 26.67,36.85 v22.88,40.64
  Bottom 0.152: v22.88,40.64 22.81,40.72 12.06,40.72 10.44,42.34 v10.44,47.24
INT2-LPS331  (via drill 0.33, 0.33 pad 0.15)
  Top 0.152: v9.96,35.63 U$4.P$9 | U$11.P$16 25.66,34.98 v25.02,35.63
  Bottom 0.152: v25.02,35.63 v9.96,35.63
INT2-LSM303  (via drill 0.33)
  Top 0.152: 10.01,67.87 U$6.P$9 11.45,67.87 v13.41,65.91 | U$11.P$10 28.73,32.98 28.73,37.49 22.88,43.33 22.88,47.24 20.04,50.09 20.04,50.52 20.04,51 v20.04,58.93
  Bottom 0.152: v13.41,65.91 13.49,65.84 13.49,60.96 14.78,59.66 19.3,59.66 v20.04,58.93
INT2-MAX21000  (via drill 0.33)
  Top 0.152: v16.03,47.62 16.03,51.15 15.9,51.27 U$19.P$9 | U$11.P$13 27.07,33.45 27.07,37.8 v22.88,41.99
  Bottom 0.152: v22.88,41.99 17.3,41.99 16.86,42.42 16.86,46.79 v16.03,47.62
LSM9D-DRGY-G
  Top 0.152: U$11.P$8 30.45,33.29 30.45,38.58 26.95,42.08 26.95,64.03 24.89,66.09 U$17.P$12
LSM9D-INT1-XM
  Top 0.152: U$11.P$7 31.32,33.45 31.32,39.06 27.96,42.42 27.96,64.92 26.33,66.56 U$17.P$13
LSM9D-INT2-XM
  Top 0.152: U$11.P$6 32.18,33.6 32.18,39.55 28.98,42.76 28.98,65.76 26.95,67.79 19.28,67.79 18.88,67.4 U$17.P$14
MISO-A
  Top 0.152: U$14.P$8 17.71,31.54 U$11.P$28
MISO-B  (via drill 0.33, 0.41)
  Top 0.152: U$6.P$7 8.38,64.87 7.59,64.08 v7.59,64.06 7.6,64.09 U$17.P$23 U$17.P$22 | U$2.P$7 24.31,49.76 v24.43,49.68 | U$15.P$6 7.4,26.07 v7.59,26.24 | U$4.P$7 6.95,34.53 7.59,33.88 v7.59,31.55 U$14.P$13 | U$3.P$4 6.95,43.31 7.52,42.75 v7.59,42.75 | U$19.P$7 14.27,49.78 v14.38,49.68 | U$10.P$7 33.12,49.99 32.81,49.68 v31.77,49.68 | U$9.P$7 6.95,52.69 v7.16,52.48
  Bottom 0.152: 7.59,49.68 v7.59,42.75 v7.59,31.55 v7.59,26.24 7.59,25.8 7.4,25.6 7.56,25.6 R6.1 | 7.59,49.68 7.59,52.35 | 7.59,52.35 v7.59,64.06 | v31.77,49.68 v24.43,49.68 v14.38,49.68 7.59,49.68 | v7.16,52.48 7.47,52.48 7.59,52.35
MOSI-A
  Top 0.152: U$14.P$7 17.66,30.89 U$11.P$29
MOSI-B  (via drill 0.33)
  Top 0.152: U$14.P$14 8.5,30.89 v6.45,30.89 U$4.P$6 | U$6.P$6 7.87,67.24 7.87,65.66 6.45,64.26 v6.45,63.02 6.77,63.06 14.8,63.06 15.32,63.59 U$17.P$24 | v8.53,48.56 v6.45,48.56 | U$19.P$6 13.77,48.68 v13.79,48.56 | U$2.P$6 23.81,48.68 v23.82,48.56 | U$3.P$3 v6.45,42.04 | v30.73,48.56 30.73,50.04 31.44,50.75 32.37,50.75 U$10.P$6 | v6.45,28.45 U$15.P$2 | U$9.P$6 v6.45,54.36 | U$4.P$6
  Bottom 0.152: 6.45,50.95 v6.45,48.56 | v6.45,48.56 v6.45,42.04 v6.45,30.89 v6.45,28.45 R4.1 | v6.45,48.56 v6.45,54.36 v6.45,63.02 | v30.73,48.56 v23.82,48.56 v13.79,48.56 v8.53,48.56
N$1
  Top 0.152: C1.1 35.48,72.08 34.61,71.2 U$1.P$1
N$3
  Top 0.152: C4.1 32.16,72.36 32.38,72.14 33.07,72.14 33.29,71.92 U$1.P$4
N$4
  Top 0.152: C10.1 4.14,46.78 4.8,46.12 U$3.P$14
N$5
  Top 0.152: C17.1 U$5.P$2
N$6
  Top 0.152: U$6.P$15 C18.1
N$7
  Top 0.152: C21.2 5.3,69.37 U$6.P$2
N$8
  Top 0.152: U$17.P$7 20.89,63.59 21.03,63.45 21.78,63.45 C48.1
N$9
  Top 0.152: R10.1 24.68,17.9 C24.2
N$10
  Top 0.152: R17.1 17.52,22.09 C30.2 18.46,23.42 U$11.P$38
N$11
  Top 0.152: U$12.P$2 11.93,19.66 C42.2 15.01,21.39 U$11.P$36
N$12
  Top 0.152: U$11.P$34 14.84,22.63 9.52,22.63 8.49,21.6 C41.1 8.49,19.61 U$12.P$1
N$14
  Top 0.152: R16.2 17.63,18.28 C43.1 14.1,17.3 13.85,17.54 U$13.P$1
N$15
  Top 0.152: U$6.P$3 5.93,68.87 5.35,68.3 C21.1
N$16
  Top 0.152: 20.04,23.57 U$11.P$40 19.51,23.05 19.51,19.66 18.97,19.13 17.78,19.13 17.46,19.45 C44.1 U$13.P$3
N$17
  Top 0.152: 20.39,23.23 U$11.P$41 19.96,22.8 19.96,19.1 19.21,18.35 R16.1
N$18  (2 unrouted)
N$19  (1 unrouted)
N$21
  Top 0.152: C49.2 22.93,64.03 20.45,64.03 20.39,64.09 U$17.P$8
N$22
  Top 0.152: U$17.P$9 21.78,64.59 C49.1
N$23  (3 unrouted)
N$24
  Bottom 0.152: TP6.P$1 R5.2
N$26
  Bottom 0.152: TP5.P$1 R8.2
N$27
  Top 0.152: R7.1 2.98,10.7 3.3,11.02 LED1.A
N$29
  Top 0.152: LED4.C R14.2
N$31
  Top 0.152: LED3.C R13.2
N$32
  Bottom 0.152: TP1.P$1 R3.2
N$33
  Bottom 0.152: TP2.P$1 R4.2
N$34
  Bottom 0.152: R6.2 TP3.P$1
N$35
  Top 0.152: LED2.C R12.2
SCL-0  (via drill 0.33)
  Top 0.152: U$11.P$23 21.32,31.47 22.32,31.47 v22.91,30.89 | U$1.P$7 33.29,63.59 v33.71,63.17 34.52,62.36 U$22.P$10 | v34.47,44.01 U$5.P$8
  Bottom 0.152: v33.71,63.17 R5.1 33.74,45.2 34.47,44.47 v34.47,44.01 34.47,42.47 v22.91,30.89 R1.1
SCLK-A
  Top 0.152: 17.94,29.9 U$11.P$30 17.6,30.24 U$14.P$6
SCLK-B  (via drill 0.33, 0.41)
  Top 0.152: U$10.P$4 v30.55,51.78 | U$9.P$4 4.77,54.11 v4.37,54.51 | U$17.P$21 v9.28,65.09 | U$15.P$4 5.5,26.12 v5.31,26.24 | v5.31,51.78 v8.53,51.78 | U$19.P$4 v14.02,51.78 | U$2.P$4 v24.05,51.78 | U$3.P$2 5.95,43.31 5.38,42.75 v5.31,42.75 | U$14.P$15 8.85,30.25 v5.31,30.25 | U$6.P$4 6.58,68.38 v6.37,68.17 | U$4.P$4 5.72,36.14 4.7,36.14 v4.57,36.27
  Bottom 0.152: 5.31,36.14 v5.31,30.25 v5.31,26.24 R3.1 | 5.31,36.14 v5.31,42.75 v5.31,51.78 5.31,54.1 | v8.53,51.78 v14.02,51.78 v24.05,51.78 v30.55,51.78 | 5.31,54.1 5.31,64.62 5.76,65.09 | 5.76,65.09 5.76,67.56 v6.37,68.17 | v4.37,54.51 4.77,54.1 5.31,54.1 | v9.28,65.09 5.76,65.09 | v4.57,36.27 4.7,36.14 5.31,36.14
SD-CARD-INSERT  (via drill 0.33)
  Top 0.152: U$11.P$60 30.94,23.26 v34.7,23.26
  Bottom 0.152: v34.7,23.26 35.13,22.83 U$18.P$8
SD-CS  (via drill 0.33)
  Top 0.152: U$11.P$62 31.14,24.48 v31.29,24.46
  Bottom 0.152: U$18.P$2 28.87,21.48 31.29,23.9 v31.29,24.46
SD-MISO  (via drill 0.33)
  Top 0.152: U$11.P$63 31.27,25.05 v33.81,25.05
  Bottom 0.152: U$18.P$7 34.37,20.8 33.78,21.39 33.78,25.03 v33.81,25.05
SD-MOSI  (via drill 0.33)
  Top 0.152: U$11.P$64 31.37,25.66 v31.9,25.66
  Bottom 0.152: U$18.P$3 29.97,21.06 31.9,22.99 v31.9,25.66
SD-SCLK  (via drill 0.33)
  Top 0.152: U$11.P$61 31.04,23.87 v32.61,23.87
  Bottom 0.152: U$18.P$5 32.17,20.64 32.61,21.08 v32.61,23.87
SDA-0  (via drill 0.33)
  Top 0.152: U$11.P$24 21.33,30.75 v21.63,30.75 | U$1.P$6 32.89,63.59 v32.46,63.17 31.72,62.43 U$22.P$1 | v33.22,44.01 33.22,43.71 U$5.P$7
  Bottom 0.152: v32.46,63.17 R8.1 32.49,44.74 v33.22,44.01 33.22,42.34 v21.63,30.75 | R2.1 v21.63,30.75 | v21.63,30.75
SPI-ADDR0
  Top 0.152: U$11.P$17 20.04,36.99 U$21.P$15
SPI-ADDR1
  Top 0.152: U$11.P$18 19.21,37.11 18.92,37.11 18.77,37.26 U$21.P$14
SPI-ADDR2
  Top 0.152: U$11.P$19 18.99,36.63 17.88,36.63 17.5,37.01 U$21.P$13
SPI-ADDR3
  Top 0.152: U$11.P$20 18.76,36.14 16.71,36.14 16.23,36.63 U$21.P$12
SPI-ENABLE  (via drill 0.33)
  Top 0.152: 17.61,29.52 U$11.P$31 17.64,29.49 v15.64,29.49 | v15.64,32.84 15.54,32.84 U$14.P$10
  Bottom 0.152: v15.64,29.49 v15.64,32.84
SWCLK  (via drill 0.33)  (1 unrouted)
  Top 0.152: U$11.P$52 27.07,21.47 27.07,19.76 27.94,18.9 28.32,18.9 28.93,18.29 v29,18.29
  Bottom 0.152: U$7.P$1 28.98,18.26
SWDIO  (via drill 0.33)
  Top 0.152: U$11.P$51 26.72,21.12 26.72,19.51 27.94,18.29 v27.99,18.29
  Bottom 0.152: U$7.P$2 v27.98,18.28 v27.99,18.29
SWO  (via drill 0.33)
  Top 0.152: U$11.P$49 25.96,20.47 25.96,19.97 25.96,18.76 v25.96,18.29
  Bottom 0.152: U$7.P$4 25.98,18.26 v25.96,18.29
TDI  (via drill 0.33)
  Top 0.152: U$11.P$50 26.34,20.79 26.34,19.23 26.97,18.59 v26.97,18.29
  Bottom 0.152: U$7.P$3 26.98,18.28 v26.97,18.29
U1RX  (via drill 0.33)
  Top 0.152: U$11.P$45 21.44,21.45 21.44,19.43 20.67,18.67 v20.67,17.75
  Bottom 0.152: 18.97,13.11 TP8.P$1 19.02,16.1 v20.67,17.75
U1TX  (via drill 0.33)
  Top 0.152: U$11.P$46 21.92,21.22 v21.92,19.02
  Bottom 0.152: TP7.P$1 22.15,18.24 v21.92,19.02

## Text on the board
Document: Dimensions goal = 38.5x67mm / $19.991200372 | Check hibernation / pin is connected / correctly